# Altium PCB TTK8.PcbDoc
Units mm, origin at the board's own origin, x right, y up, seen from the top; angles counter-clockwise.
Board outline 71.55 x 67.6 mm, 2 copper layers (Top Layer, Bottom Layer); 28 components, 25 nets, 141 pads, 33 vias.
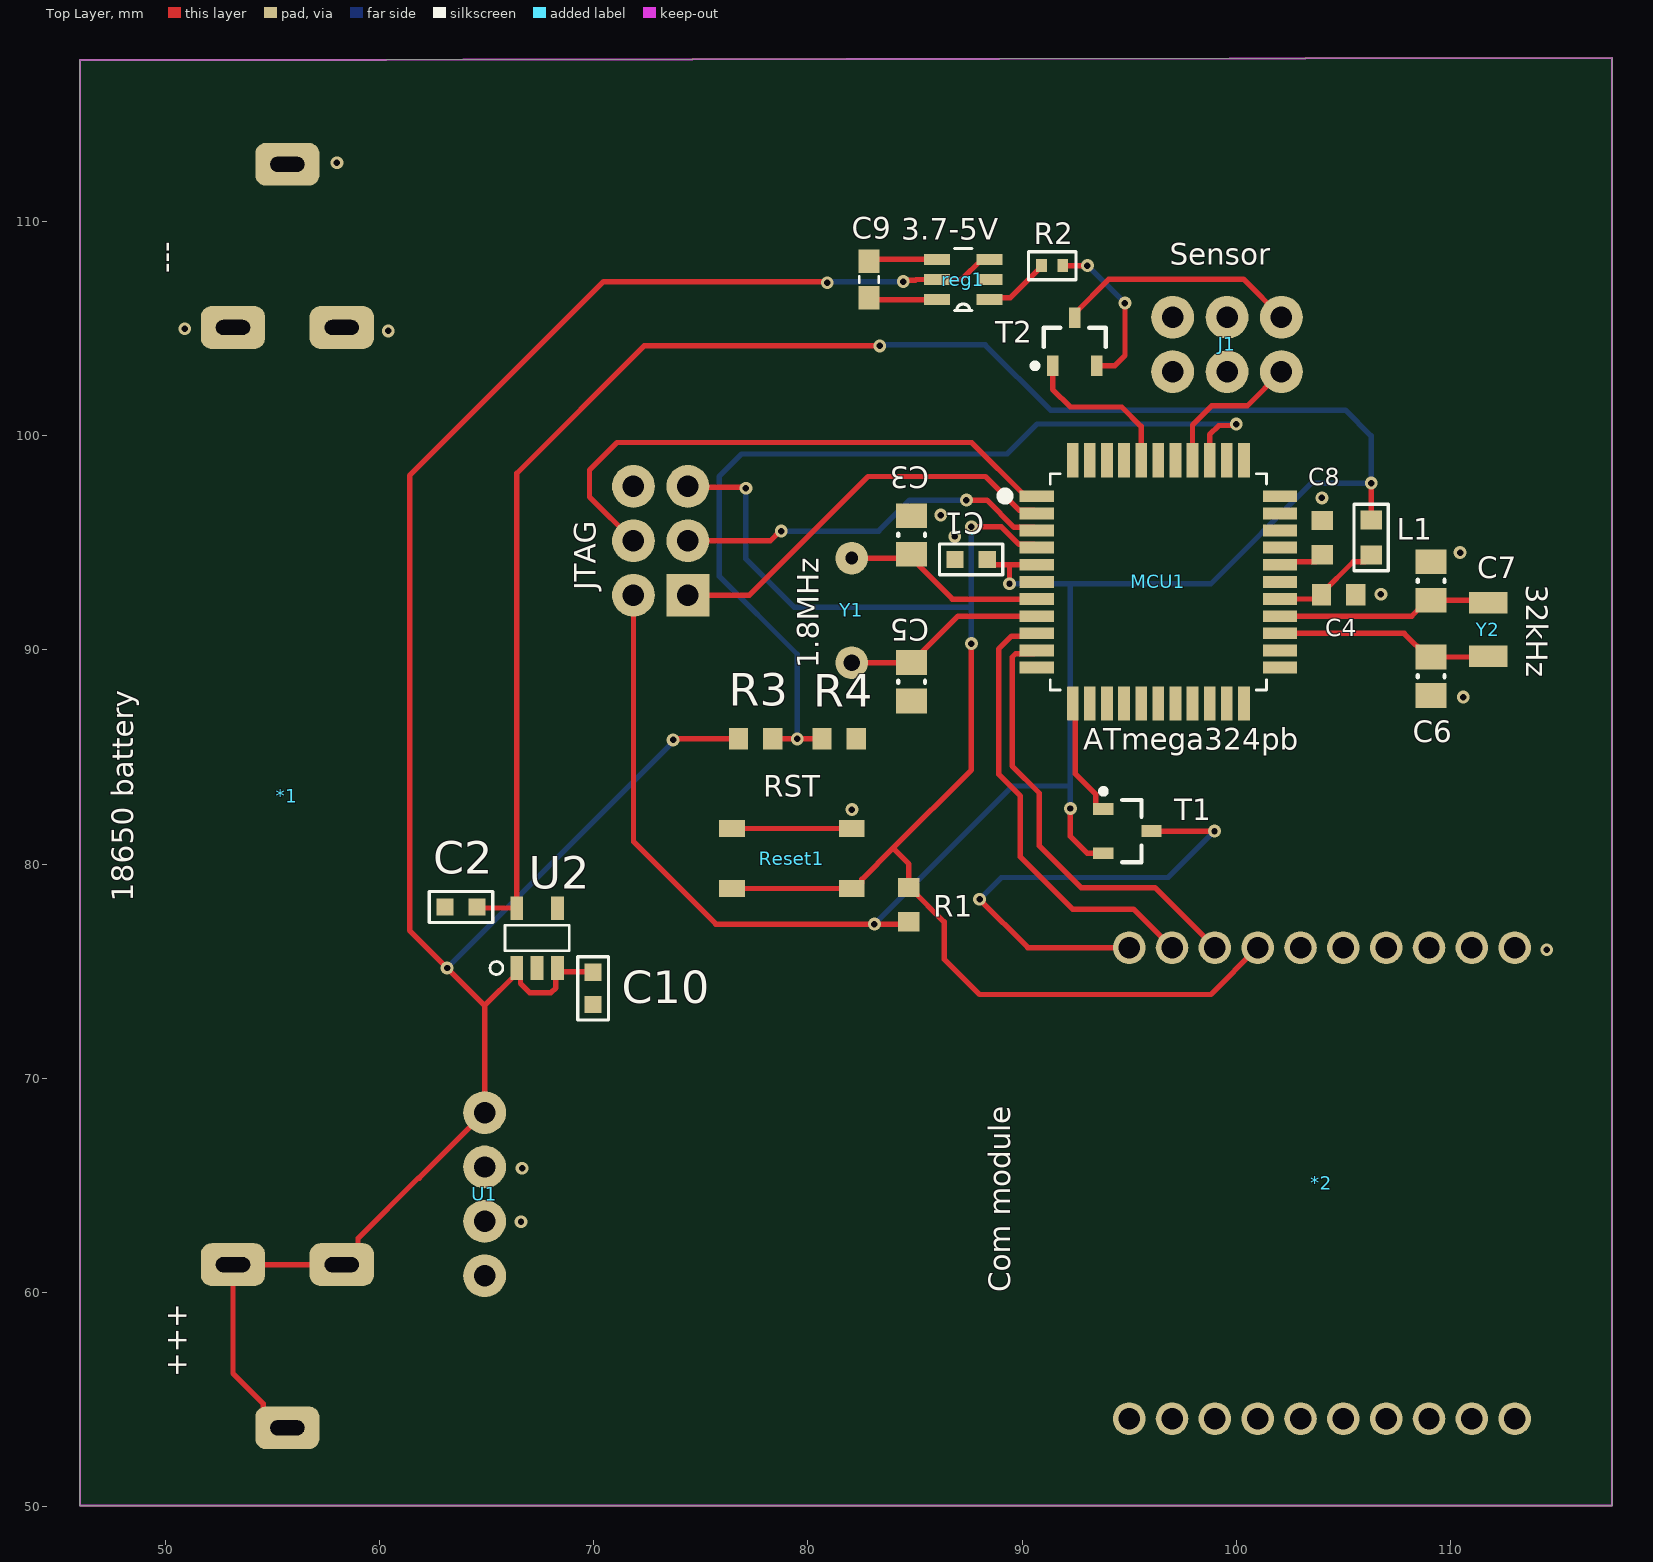
[diagram p0: Top Layer view]
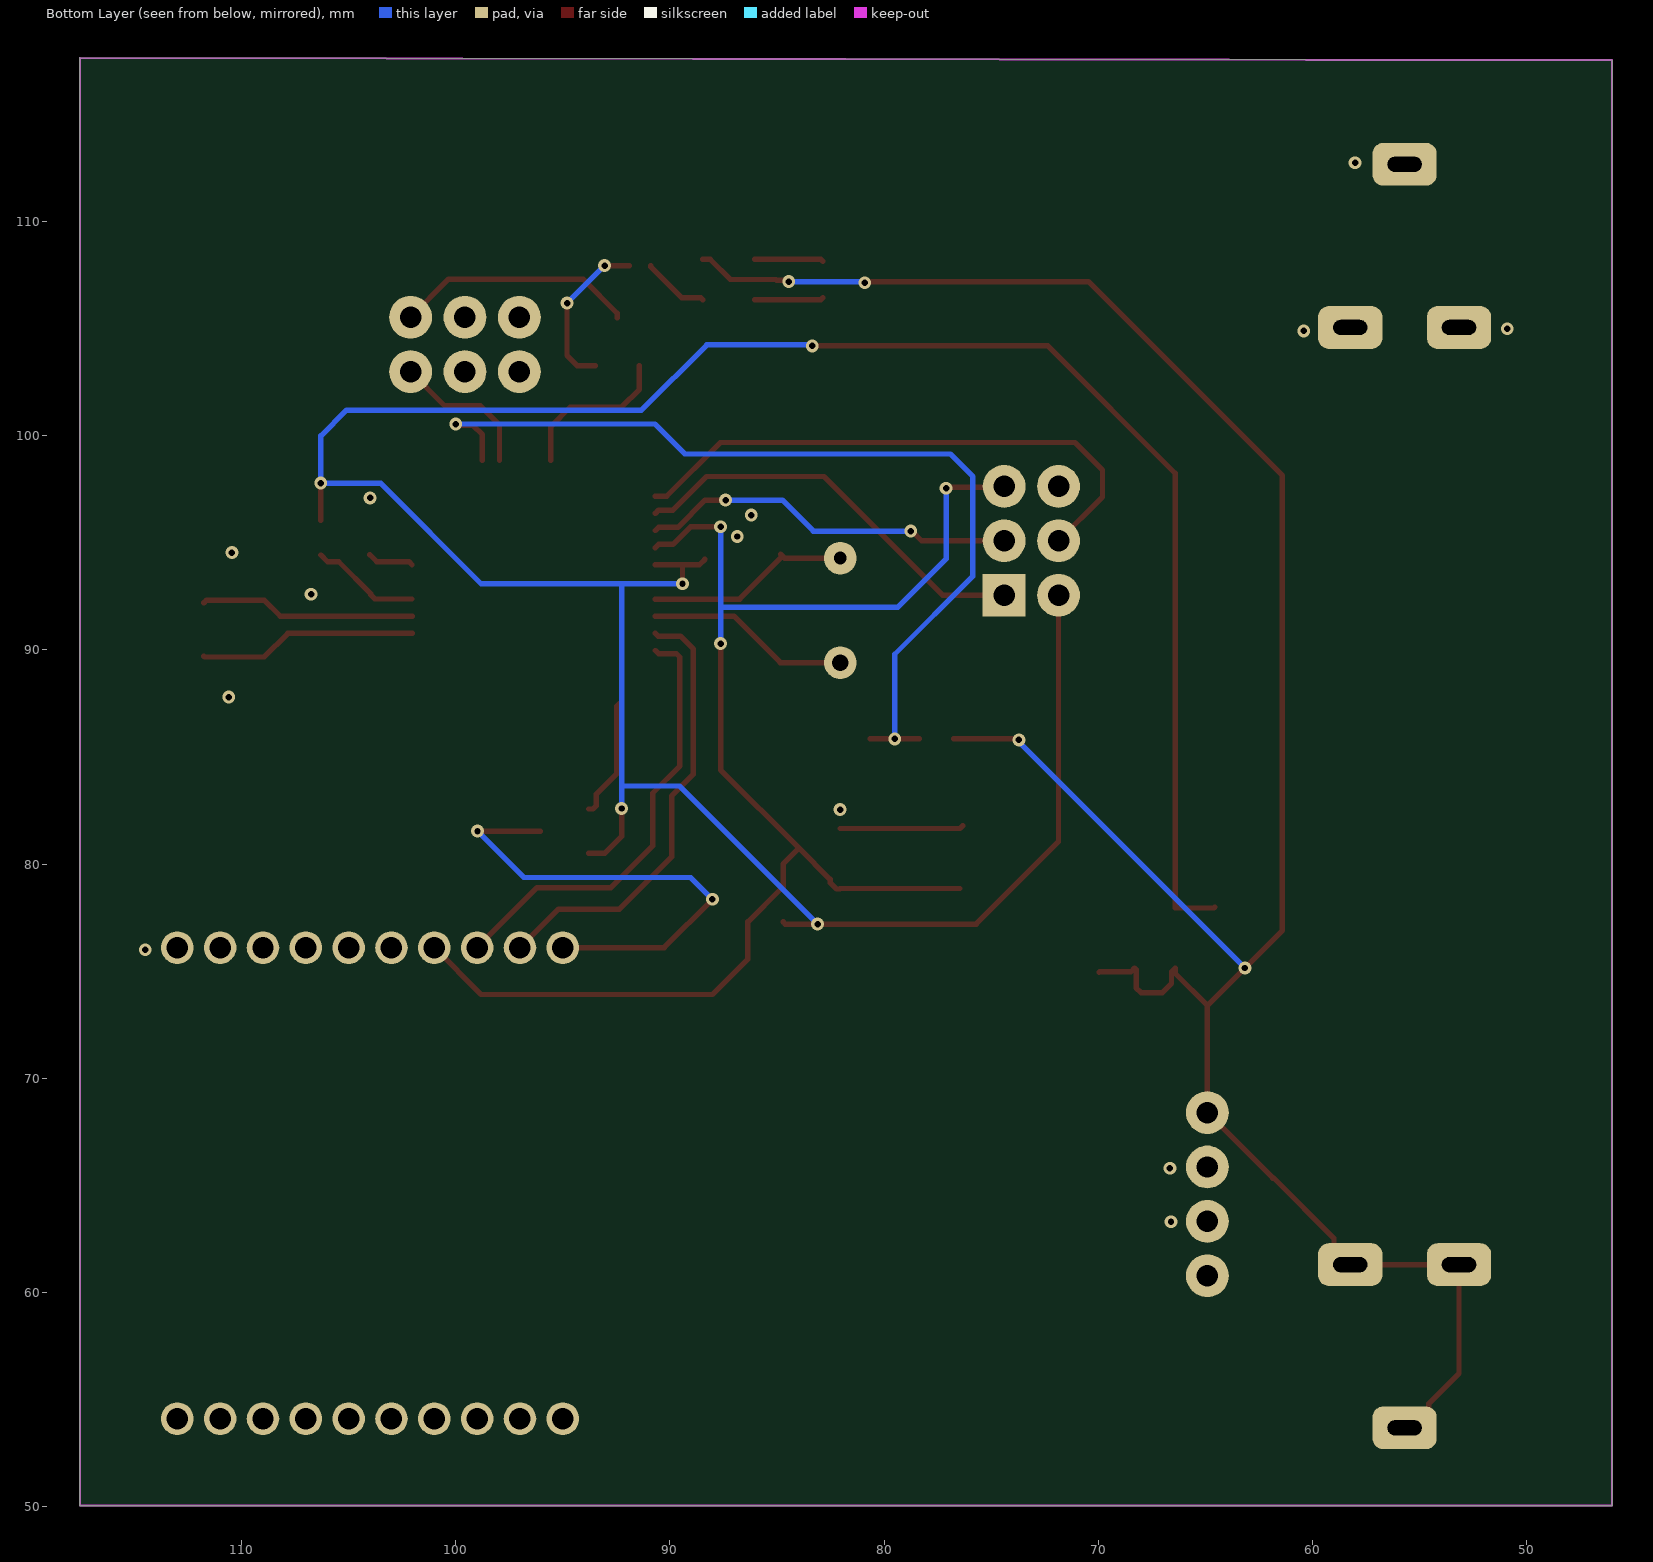
[diagram p1: Bottom Layer view, seen from below]

## Layer stack, top to bottom
Top Solder: solder mask 0.0102, Solder Resist, Dk 3.5
Top Layer: signal copper 0.0356
Dielectric 1: dielectric 0.32, FR-4, Dk 4.8
Bottom Layer: signal copper 0.0356
Bottom Solder: solder mask 0.0102, Solder Resist, Dk 3.5

## Board outline
46,117.541 46,50.05 117.55,50.05 117.55,117.65

## Design rules (kind name [scope] priority, off if disabled: settings)
Clearance [All] p1: gap=0.16 ignorepadtopadclearanceinfootprint=FALSE except(0: Arc-Text Arc-Hole Track-Text Track-Hole SMDPad-Text SMDPad-Hole THPad-Text THPad-Hole Via-Text Via-Hole Fill-Text Fill-Hole Poly-Text Poly-Hole Region-Text Region-Hole Text-Text Text-Hole)
DiffPairsRouting [All] p1: maxlimit=0.254 minlimit=0.254 mostfreqgap=0.254 toplayer_minwidth=0.16 toplayer_maxwidth=0.381 toplayer_prefwidth=0.2 bottomlayer_minwidth=0.16 bottomlayer_maxwidth=0.381 bottomlayer_prefwidth=0.2 maxuncoupledlength=12.7
Height [All] p1: minheight=0 maxheight=200 prefheight=12.7
HoleSize [All] p1: absolutevalues=TRUE maxlimit=6.35 minlimit=0.3 maxpercent=80.000 minpercent=20.000
MinimumSolderMaskSliver [All] p1: minsoldermaskwidth=0.1
PlaneClearance [All] p1: clearance=1
PlaneConnect [All] p1: planeconnectstyle=Relief reliefexpansion=0.508 reliefentries=4 reliefconductorwidth=1 reliefairgap=0.254
PolygonConnect PolygonConnect_1 [IsVia] p1: connectstyle=Direct reliefconductorwidth=0.254 reliefentries=4 polygonreliefangle="90 Angle" airgapwidth=0.254
PolygonConnect [All] p2: connectstyle=Relief reliefconductorwidth=0.2 reliefentries=4 polygonreliefangle="90 Angle" airgapwidth=0.2
RoutingVias [All] p1: holewidth=0.3 width=0.6 viastyle="Through Hole" minholewidth=0.3 minwidth=0.6 maxholewidth=6.35 maxwidth=10
SilkToSolderMaskClearance [IsPad] p1: minsilkscreentomaskgap=0.09 clearancetoexposedcopper=TRUE
SolderMaskExpansion [All] p1: expansion=0.102
Width [All] p1: maxlimit=5 minlimit=0.16 preferedwidth=0.25 minimp=50.000000 maximp=50.000000 favimp=50.000000
23 further rules are at their usual default settings.

## Components (designator, comment, footprint, x,y, rotation, side; value= is the part's Value field where it differs from the comment)
*1 "18650" 18650 55.69,53.68 r90 top
*2 "Header1X10" Header1X10 95,76.1 r270 top
C1 "02016D104KAT2A" C0603 87.618,94.234 r0 top value=100nF
C2 "02016D104KAT2A" C0603 63.8,78 r0 top value=100nF
C3 "22pF" CAPC0805(2012)100_N 84.836,95.377 r90 top
C4 "100nF" CAPC0603(1608)55_N 104.775,92.583 r180 top
C5 "22pF" CAPC0805(2012)100_N 84.836,88.519 r270 top
C6 "22pF" CAPC0805(2012)100_N 109.093,88.773 r270 top
C7 "22pF" CAPC0805(2012)100_N 109.093,93.229 r90 top
C8 "100nF" CAPC0603(1608)55_N 104.013,95.25 r270 top
C9 "C0603C105K8PACTU" C0603C105K8PACTU 82.85,107.3 r270 top value=1uf
C10 "02016D104KAT2A" C0603 69.964,74.2 r90 top value=100nF
J1 "Header 2x3" "Header 2x3 2.54mm" 97.028,105.537 r270 top
JTAG "123-34-2234_1" "Header 2x3 male" 74.39,97.64 r180 top
L1 "MLZ1608A2R2WT" "Inductor 0603" 106.299,95.25 r90 top value=10uH
MCU1 "ATMEGA324PB-AU" *QFP80P1200X1200X120-44N 96.358,93.18 r0 top
R1 "10k" RESC0603(1608)_N 84.709,78.105 r270 top
R2 "CRCW04020000Z0ED" R0402 91.4,107.95 r0 top value="0 ohm"
R3 "174k" RESC0603(1608)_N 77.55,85.85 r180 top
R4 "225k" RESC0603(1608)_N 81.45,85.85 r180 top
reg1 "CAT3200TDI-GT3" CAT3200TDI-GT3 87.25,107.3 r180 top
Reset1 "KSC222G LFS" "KSC222G LFS" 79.248,80.264 r90 top
T1 "DMP1045U" DMP1045U 94.919,81.543 r0 top
T2 "DMP1045U" DMP1045U 92.456,104.394 r90 top
U1 "AdaUSBC" AdaUSBC 64.9,60.78 r90 top
U2 "NCP718ASN250T1G" NCP718ASN250T1G 67.35,76.55 r0 top
Y1 "AB-1.8432MHZ-B2" AB-1.8432MHZ-B2 82.042,89.408 r90 top
Y2 "9HT10-32.768KEZC-T" 9HT10-32.768KEZC-T 111.76,89.702 r90 top

## Footprints (in the part's own frame and the unit in brackets; to place one, negate y for a bottom-side part, rotate by r counter-clockwise, add the part's x,y. Pads: shape width x height; smd on the part's side, far side on the other; paste and mask are expansions set on the pad)
9HT10-32.768KEZC-T [mm]
  rect 1x1.8 smd: 1(0,0) 2(2.5,0)
18650 [mm] "18650 battery holder"
  rrect50% 2x3 hole 1.6 slot 0.7 at 0 deg: 1(0,0) 1(7.62,-2.54) 1(7.62,2.54) 2(51.38,-2.54) 2(51.38,2.54) 2(59,0)
*QFP80P1200X1200X120-44N [mm]
  rect 1.6x0.55 smd mask+0.15: 1(-5.68,4) 2(-5.68,3.2) 3(-5.68,2.4) 4(-5.68,1.6) 5(-5.68,0.8) 6(-5.68,0) 7(-5.68,-0.8) 8(-5.68,-1.6) 9(-5.68,-2.4) 10(-5.68,-3.2) 11(-5.68,-4) 23(5.68,-4) 24(5.68,-3.2) 25(5.68,-2.4) 26(5.68,-1.6) 27(5.68,-0.8) 28(5.68,0) 29(5.68,0.8) 30(5.68,1.6) 31(5.68,2.4) 32(5.68,3.2) 33(5.68,4)
  rect 0.55x1.6 smd mask+0.15: 12(-4,-5.68) 13(-3.2,-5.68) 14(-2.4,-5.68) 15(-1.6,-5.68) 16(-0.8,-5.68) 17(0,-5.68) 18(0.8,-5.68) 19(1.6,-5.68) 20(2.4,-5.68) 21(3.2,-5.68) 22(4,-5.68) 34(4,5.68) 35(3.2,5.68) 36(2.4,5.68) 37(1.6,5.68) 38(0.8,5.68) 39(0,5.68) 40(-0.8,5.68) 41(-1.6,5.68) 42(-2.4,5.68) 43(-3.2,5.68) 44(-4,5.68)
  silkscreen extent -7.36,-5.05 5.05,5.05
AB-1.8432MHZ-B2 [mil]
  round 60 hole 30: 1(0,0)
  round 60 hole 23.62: 2(192.13,0)
AdaUSBC [mm]
  round 2 hole 1: 1(0,0) 2(2.54,0) 3(5.08,0) 4(7.62,0)
C0603 [mm]
  rect 0.8x0.8 smd: 1(-0.75,0) 2(0.75,0)
  silkscreen extent -1.48,-0.72 1.48,0.72, body extent -0.8,-0.4 0.8,0.4, height 0.8
C0603C105K8PACTU [mm] "C0603"
  rect 1.1x1 smd: 1(-0.85,0) 2(0.85,0)
  silkscreen extent -0.15,-0.45 0.15,0.45
CAPC0603(1608)55_N [mm] "Chip Capacitor, Body 1.6x0.8mm, Height 0.55mm, IPC Medium Density"
  rect 0.9x1 smd: 1(-0.8,0) 2(0.8,0)
  body extent -0.87,-0.48 0.88,0.47, height 0.55
CAPC0805(2012)100_N [mm] "Chip Capacitor, Body 2.0x1.2mm, Height 1.0mm, IPC Medium Density"
  rect 1.15x1.45 smd: 1(-0.9,0) 2(0.9,0)
  silkscreen extent -0.05,-0.62 0.05,0.63, body extent -1.1,-0.72 1.1,0.73, height 1
CAT3200TDI-GT3 [mil] "Switch-mode step up reg"
  rect 48x20 smd: 1(-48,37) 2(-48,0) 3(-48,-37) 4(48,-37) 5(48,0) 6(48,37)
  silkscreen extent -16,-57 16,57
DMP1045U [mm] "SOT23, 3-Leads, Body 2.85x2.35mm, Pitch 1.03mm, IPC Medium Density"
  rect 0.95x0.55 smd: 1(-1.125,1.03) 2(-1.125,-1.03) 3(1.125,0)
  silkscreen extent -1.25,-1.45 0.65,1.98, body extent -1.2,-1.45 1.2,1.45, height 1.02
Header1X10 [mil]
  round 60 hole 39.37: 1(0,0) 2(0,78.74) 3(0,157.48) 4(0,236.22) 5(0,314.96) 6(0,393.7) 7(0,472.44) 8(0,551.18) 9(0,629.92) 10(0,708.66) 11(866,708.66) 12(866,629.92) 13(866,551.18) 14(866,472.44) 15(866,393.7) 16(866,314.96) 17(866,236.22) 18(866,157.48) 19(866,78.74) 20(866,0)
"Header 2x3 2.54mm" [mm]
  round 2 hole 1: 1(0,0) 2(2.54,0) 3(0,2.54) 4(2.54,2.54) 5(0,5.08) 6(2.54,5.08)
  body extent -1.27,-1.27 3.81,6.35, height 8.38
"Header 2x3 male" [mm]
  rect 2x2 hole 1: 1(0,5.08)
  round 2 hole 1: 2(2.54,5.08) 3(0,2.54) 4(2.54,2.54) 5(0,0) 6(2.54,0)
  body extent -1.27,-1.27 3.81,6.35, height 8.89
"Inductor 0603" [mm]
  rect 0.88x0.99 smd: 1(-0.815,0) 2(0.815,0)
  silkscreen extent -1.55,-0.8 1.55,0.8, body extent -0.87,-0.48 0.87,0.48, height 0.91
"KSC222G LFS" [mm]
  rect 0.8x1.2 smd: 1(-1.4,2.794) 2(-1.4,-2.794) 3(1.4,2.794) 4(1.4,-2.794)
  body extent -2.29,-3.06 2.29,3.05, height 1.5
NCP718ASN250T1G [mm]
  rect 0.6x1.1 smd: 1(-0.95,-1.4) 2(0,-1.4) 3(0.95,-1.4) 4(0.95,1.4) 5(-0.95,1.4)
  silkscreen extent -2.2,-1.7 1.5,0.6
R0402 [mm]
  rect 0.5x0.6 smd: 1(-0.5,0) 2(0.5,0)
  silkscreen extent -1.1,-0.65 1.11,0.64, body extent -0.5,-0.25 0.5,0.25, height 0.35
RESC0603(1608)_N [mm] "Chip Resistor, Body 1.6x0.8mm, IPC Medium Density"
  rect 0.9x1 smd: 1(-0.8,0) 2(0.8,0)
  body extent -0.85,-0.47 0.85,0.47, height 0.6

## Part data
C1 C2 C9 C10: "C0603"
C3 C5 C6 C7: library part 3133, "50v,", antall=1000, dybde=5, hylle=0, id=3133, komponenttype=2, lager_type=Baklager, leverandor=Farnell, navn=22pF, pakke_opprettet="14.11.2014 20:52:01", pakke_opprettet_av=815, pakketype=0805, pris=1, rad=21, rom=GM, symbol_opprettet="14.11.2014 20:19:34", symbol_opprettet_av=815
C4 C8: library part 5152, "X7R 50V 5%", antall=1000, dybde=0, hylle=0, id=5152, komponenttype=2, lager_type=Baklager, leverandor=Farnell, leverandor_varenr=1759122, navn=100nF, nokkelord="Kondensator, Capacitor, CAP", pakke_opprettet="18.02.2015 14:18:13", pakke_opprettet_av=815, pakketype=0603, pris=1, produsent=Multikomp, rad=21, rom=OV, symbol_opprettet="14.11.2014 20:19:34", symbol_opprettet_av=815
J1: library part 67996-406HLF, "Header  2x3 2.54mm male"
JTAG: "Header 2x3 male 2.54mm"
L1: "Inductor 0603"
MCU1: "Avr, 32kb Flash, 1kb Ee, 2kb Ram - 20mhz, Tqfp, Ind Temp, Green 5 v/ Tqfp _a_", Package="TQFP-44 Microchip", Availability=Unavailable, MF=Microchip, MP=ATMEGA324PB-AU, Price=None, SnapEDA_Link=https://www.snapeda.com/parts/ATMEGA324PB-AU/Microchip/view-part/?ref=snap
R1 R3 R4: library part 5264, "0.1W 1% Thick film resistor", antall=1200, dybde=3, hylle=6, id=5264, komponenttype=1, lager_type=Baklager, leverandor=Farnell, leverandor_varenr=2447230, navn=10k, nokkelord="Resistor Motstand", pakke_opprettet="08.07.2014 21:15:30", pakke_opprettet_av=815, pakketype=0603, pris=0, produsent=Multikomp, rad=1, rom=OV, symbol_opprettet="08.07.2014 21:16:33", symbol_opprettet_av=815
R2: "R0402"
reg1: "Switch-mode step up reg"
Reset1: "Button SMD"
T1 T2: "PMOS 5.2A -550mV", Cont. drain current=5.2A, Supplier Part Number 1=2061526, Threshold voltage=-550mV, Supplier 1=Farnell
Y1: "Crystal 1.8432MHz"
Y2: "Crystal 32.768kHz, SMD, 3.2mm x 1.5mm, 9pF, 10 ppm"

## Via types
v1: diameter 0.6, hole 0.3, Top Layer to Bottom Layer, tented both sides, 26 vias
v2: diameter 0.6, hole 0.3, Top Layer to Bottom Layer, 7 vias

## Nets (pads, with @x,y where several pads share a name; then routed paths per layer and width w, separated by ;. In a path a pad name is that pad's centre, name@x,y a point inside that pad or via, vN(x,y) a via of type N, cw(c..) or ccw(c..) an arc to the next point about the centre after c; other vN are vias at no path point)
A0: J1.6 MCU1.37 | length 6.8
  Top Layer w0.25: MCU1.37 97.958,100.508 98.85,101.4 100.511,101.4 J1.6
GND: *1.2 *2.10 C1.1 C2.1 C3.2 C4.1 C5.2 C6.2 C7.2 C8.1 C10.1 J1.2 J1.4 JTAG.6 MCU1.6 MCU1.28 R4.1 reg1.2 Reset1.3 Reset1.4 U1.2 U1.3 U2.2 U2.4 | length 5.8
  Top Layer w0.25: Reset1.3@76.327,81.791 Reset1.3 Reset1.4
  other v1: 66.65,65.8 114.5,76 82.05,82.55 110.6,87.8 106.75,92.6 110.45,94.55 86.85,95.3 86.2,96.3 104,97.1 60.4,104.9 50.9,105 58,112.75
GPIO1: MCU1.40 T2.1 | length 7.5
  Top Layer w0.25: T2.1 91.426,102.174 92.25,101.35 94.65,101.35 95.558,100.442 MCU1.40
GPIO2: MCU1.12 T1.1 | length 5.6
  Top Layer w0.25: MCU1.12 92.475,87.383 92.475,84.225 93.444,83.256 93.444,82.723 93.594,82.573 T1.1
MISO: JTAG.1 MCU1.2 | length 19.3
  Top Layer w0.25: JTAG.1 77.26,92.56 82.8,98.1 88.28,98.1 89.85,96.53 90.528,96.53 MCU1.2
MOSI: JTAG.4 MCU1.1 | length 26.6
  Top Layer w0.25: JTAG.4 69.8,97.15 69.8,98.4 71.092,99.691 87.641,99.691 90.153,97.18 MCU1.1
Net*2_1: *2.1 T1.3 | length 23.2
  Top Layer w0.25: v1(88.011,78.359) 90.27,76.1 *2.1 ; T1.3 v1(98.983,81.543)
  Bottom Layer w0.25: v1(88.011,78.359) 89.027,79.375 96.815,79.375 v1(98.983,81.543)
NetC4_2: C4.2 L1.1 MCU1.27 | length 5.1
  Top Layer w0.25: MCU1.27 103.772,92.38 C4.2 103.975,92.633 105.462,94.12 105.984,94.12 L1.1
NetC8_2: C8.2 MCU1.29 | length 2.2
  Top Layer w0.25: MCU1.29 102.183,94.125 103.688,94.125 C8.2
NetC9_1: C9.1 reg1.4 | length 3.2
  Top Layer w0.25: C9.1 82.94,108.24 reg1.4
NetC9_2: C9.2 reg1.6 | length 3.2
  Top Layer w0.25: C9.2 82.94,106.36 reg1.6
NetJ1_5: J1.5 T2.3 | length 11.2
  Top Layer w0.25: T2.3 92.456,105.719 94.052,107.315 100.33,107.315 J1.5
NetMCU1_36: MCU1.36 R3.1 R4.2 | length 43.8
  Top Layer w0.25: R3.1 v2(79.5,85.85) R4.2 ; MCU1.36 98.758,100.058 99.183,100.483 v1@99.933,100.483
  Bottom Layer w0.25: v2(79.5,85.85) 79.5,89.8 75.85,93.45 75.85,98.1 76.9,99.15 89.3,99.15 90.7,100.55 v1(100,100.55)
NetR2_1: R2.1 reg1.1 | length 3.1
  Top Layer w0.25: reg1.1 88.563,106.454 89.454,106.454 90.9,107.9 R2.1
R\E\S\E\T\: *2.4 JTAG.5 MCU1.4 R1.1 Reset1.1 Reset1.2 | length 68.3
  Top Layer w0.25: JTAG.5 74.435,97.595 77.055,97.595 v1(77.1,97.55) ; Reset1.1 Reset1.2 82.065,78.841 82.219,78.841 82.517,79.139 82.517,79.292 83.972,80.747 ; v1(87.63,90.297) 87.63,84.405 83.972,80.747 ; v1(87.63,95.758) 89.022,95.758 89.85,94.93 90.528,94.93 MCU1.4 ; *2.4 98.814,73.914 88.011,73.914 86.36,75.565 86.36,77.304 84.797,78.867 84.747,78.867 R1.1 84.709,80.01 83.972,80.747
  Bottom Layer w0.25: v1(77.1,97.55) 77.1,94.25 79.35,92 87.63,92 ; v1(87.63,90.297) 87.63,92 ; v1(87.63,95.758) 87.63,92
RX: *2.3 MCU1.10 | length 20.8
  Top Layer w0.25: MCU1.10 90.528,89.83 89.703,89.83 89.535,89.662 89.535,84.582 90.805,83.312 90.805,80.845 92.75,78.9 96.2,78.9 *2.3
SCK: JTAG.3 MCU1.3 | length 17.7
  Top Layer w0.25: JTAG.3 78.245,95.1 78.695,95.55 v1(78.75,95.55) ; v1(87.4,97) 88.36,97 89.63,95.73 90.528,95.73 MCU1.3
  Bottom Layer w0.25: v1(78.75,95.55) 83.3,95.55 84.75,97 v1(87.4,97)
TOSC1: C6.1 MCU1.25 Y2.1 | length 10.2
  Top Layer w0.25: MCU1.25 107.836,90.78 108.943,89.673 C6.1 111.731,89.673 Y2.1
  Top Layer w0.254: MCU1.25 MCU1.25@102.044,90.773
TOSC2: C7.1 MCU1.26 Y2.2 | length 10.1
  Top Layer w0.25: MCU1.26 108.194,91.58 108.943,92.329 C7.1 111.633,92.329 Y2.2
  Top Layer w0.254: MCU1.26 MCU1.26@102.044,91.573
TX: *2.2 MCU1.9 | length 21.1
  Top Layer w0.25: MCU1.9 90.544,90.646 89.503,90.646 88.9,90.043 88.9,84.201 89.916,83.185 89.916,80.334 92.35,77.9 95.2,77.9 *2.2
Vbat: *1.1 C10.2 R3.2 reg1.3 reg1.5 U1.4 U2.1 U2.3 | length 112.2
  Top Layer w0.25: *1.1@55.69,53.68 55.418,53.68 54.571,54.526 54.571,54.799 53.15,56.22 53.15,61.3 58.23,61.3 58.989,62.059 58.989,62.529 61.8,65.34 61.84,65.34 U1.4 64.9,73.4 ; C10.2 69.939,74.975 68.475,74.975 U2.3 68.225,75.075 68.225,74.225 68,74 67,74 66.575,74.425 66.575,74.975 U2.1 66.4,74.9 64.9,73.4 ; v2(73.7,85.8) 73.75,85.85 R3.2 ; v2(80.9,107.15) 80.85,107.2 70.45,107.2 61.4,98.15 61.4,76.9 v2(63.15,75.15) 64.9,73.4 ; v2(84.45,107.2) 84.517,107.267 85.013,107.267 85.046,107.3 reg1.5 87.174,107.3 88.114,108.24 reg1.3
  Bottom Layer w0.25: v2(63.15,75.15) 73.7,85.7 v2(73.7,85.8) ; v2(80.9,107.15) 80.95,107.2 v2(84.45,107.2)
VCC: C1.2 C2.2 JTAG.2 L1.2 MCU1.5 R1.2 T1.2 U2.5 | length 144
  Top Layer w0.25: C2.2 64.6,77.95 U2.5 66.4,98.25 72.35,104.2 v1(83.35,104.2) ; JTAG.2 71.85,81.05 75.7,77.2 v1(83.1,77.2) 84.604,77.2 R1.2 ; C1.2 88.622,93.98 89.408,93.98 ; v1(89.408,93.091) 89.408,93.98 ; MCU1.5 89.408,93.98 ; v1@92.281,82.631 v1(92.25,82.6) 92.25,81.3 93.037,80.513 T1.2 ; L1.2 v1(106.299,97.79)
  Bottom Layer w0.25: v1(83.1,77.2) 89.55,83.65 92.25,83.65 ; v1(83.35,104.2) v1@83.4,104.25 ; v1@83.45,104.3 v1@83.4,104.25 ; v1(89.408,93.091) 92.25,93.091 ; v1(92.25,82.6) 92.25,83.65 ; v1@83.4,104.25 88.272,104.25 91.322,101.2 105.1,101.2 106.299,100.001 v1(106.299,97.79) 103.505,97.79 98.806,93.091 92.25,93.091 ; 92.25,83.65 92.25,93.091
Vsensor: R2.2 T2.2 | length 7.6
  Top Layer w0.25: R2.2 v2(93.05,107.95) ; T2.2 94.319,103.269 94.8,103.75 v2(94.8,106.2)
  Bottom Layer w0.25: v2(93.05,107.95) v2(94.8,106.2)
XTAL1: C5.1 MCU1.8 Y1.1 | length 9.5
  Top Layer w0.25: Y1.1 84.825,89.408 C5.1
  Top Layer w0.254: C5.1@84.836,89.408 87.008,91.58 MCU1.8
XTAL2: C3.1 MCU1.7 Y1.2 | length 9.5
  Top Layer w0.25: Y1.2 84.647,94.288 C3.1
  Top Layer w0.254: C3.1@84.836,94.288 86.744,92.38 MCU1.7
pads on no net: *2.5 *2.6 *2.7 *2.8 *2.9 *2.11 *2.12 *2.13 *2.14 *2.15 *2.16 *2.17 *2.18 *2.19 *2.20 J1.1 J1.3 MCU1.11 MCU1.13 MCU1.14 MCU1.15 MCU1.16 MCU1.17 MCU1.18 MCU1.19 MCU1.20 MCU1.21 MCU1.22 MCU1.23 MCU1.24 MCU1.30 MCU1.31 MCU1.32 MCU1.33 MCU1.34 MCU1.35 MCU1.38 MCU1.39 MCU1.41 MCU1.42 MCU1.43 MCU1.44 U1.1
copper on no net: | length 0.1
  Top Layer w0.25: 64.9,60.78 64.955,60.725
  other v1: 66.6,63.3

## Polygon pours and split planes (outlines as drawn)
GND on Bottom Layer "Top Layer-No Net1" (solid, shelved, pour order 3): 46,117.541 46,50.05 117.55,50.05 117.55,117.65
GND on Top Layer "Top Layer-No Net" (solid, remove dead copper, shelved, pour order 2): 46,117.541 46,50.05 117.55,50.05 117.55,117.65

## Keep-outs
Keep-Out Layer:
  the board outline again, w0.1

## Silkscreen, mask and mechanical layers (free items; w line width, h text height)
Top Overlay:
  text "3.7-5V" at 84.35,109.15 h1
  text "Sensor" at 96.9,108 h1
  text "---" at 50.5,107.6 h1 r90
  text "32kHz" at 113.55,93.05 h1 r270
  text "1.8MHz" at 80.5,89.15 h1 r90
  text "ATmega324pb" at 92.85,85.35 h1
  text "RST" at 77.9,83.15 h1
  text "18650 battery" at 48.5,78.25 h1 r90
  text "Com module" at 89.45,60 h1 r90
  text "+++" at 51,56.05 h1 r90